# EAGLE board miniBCS-4_J005904M (EAGLE 7.7.0), part 1 of 2
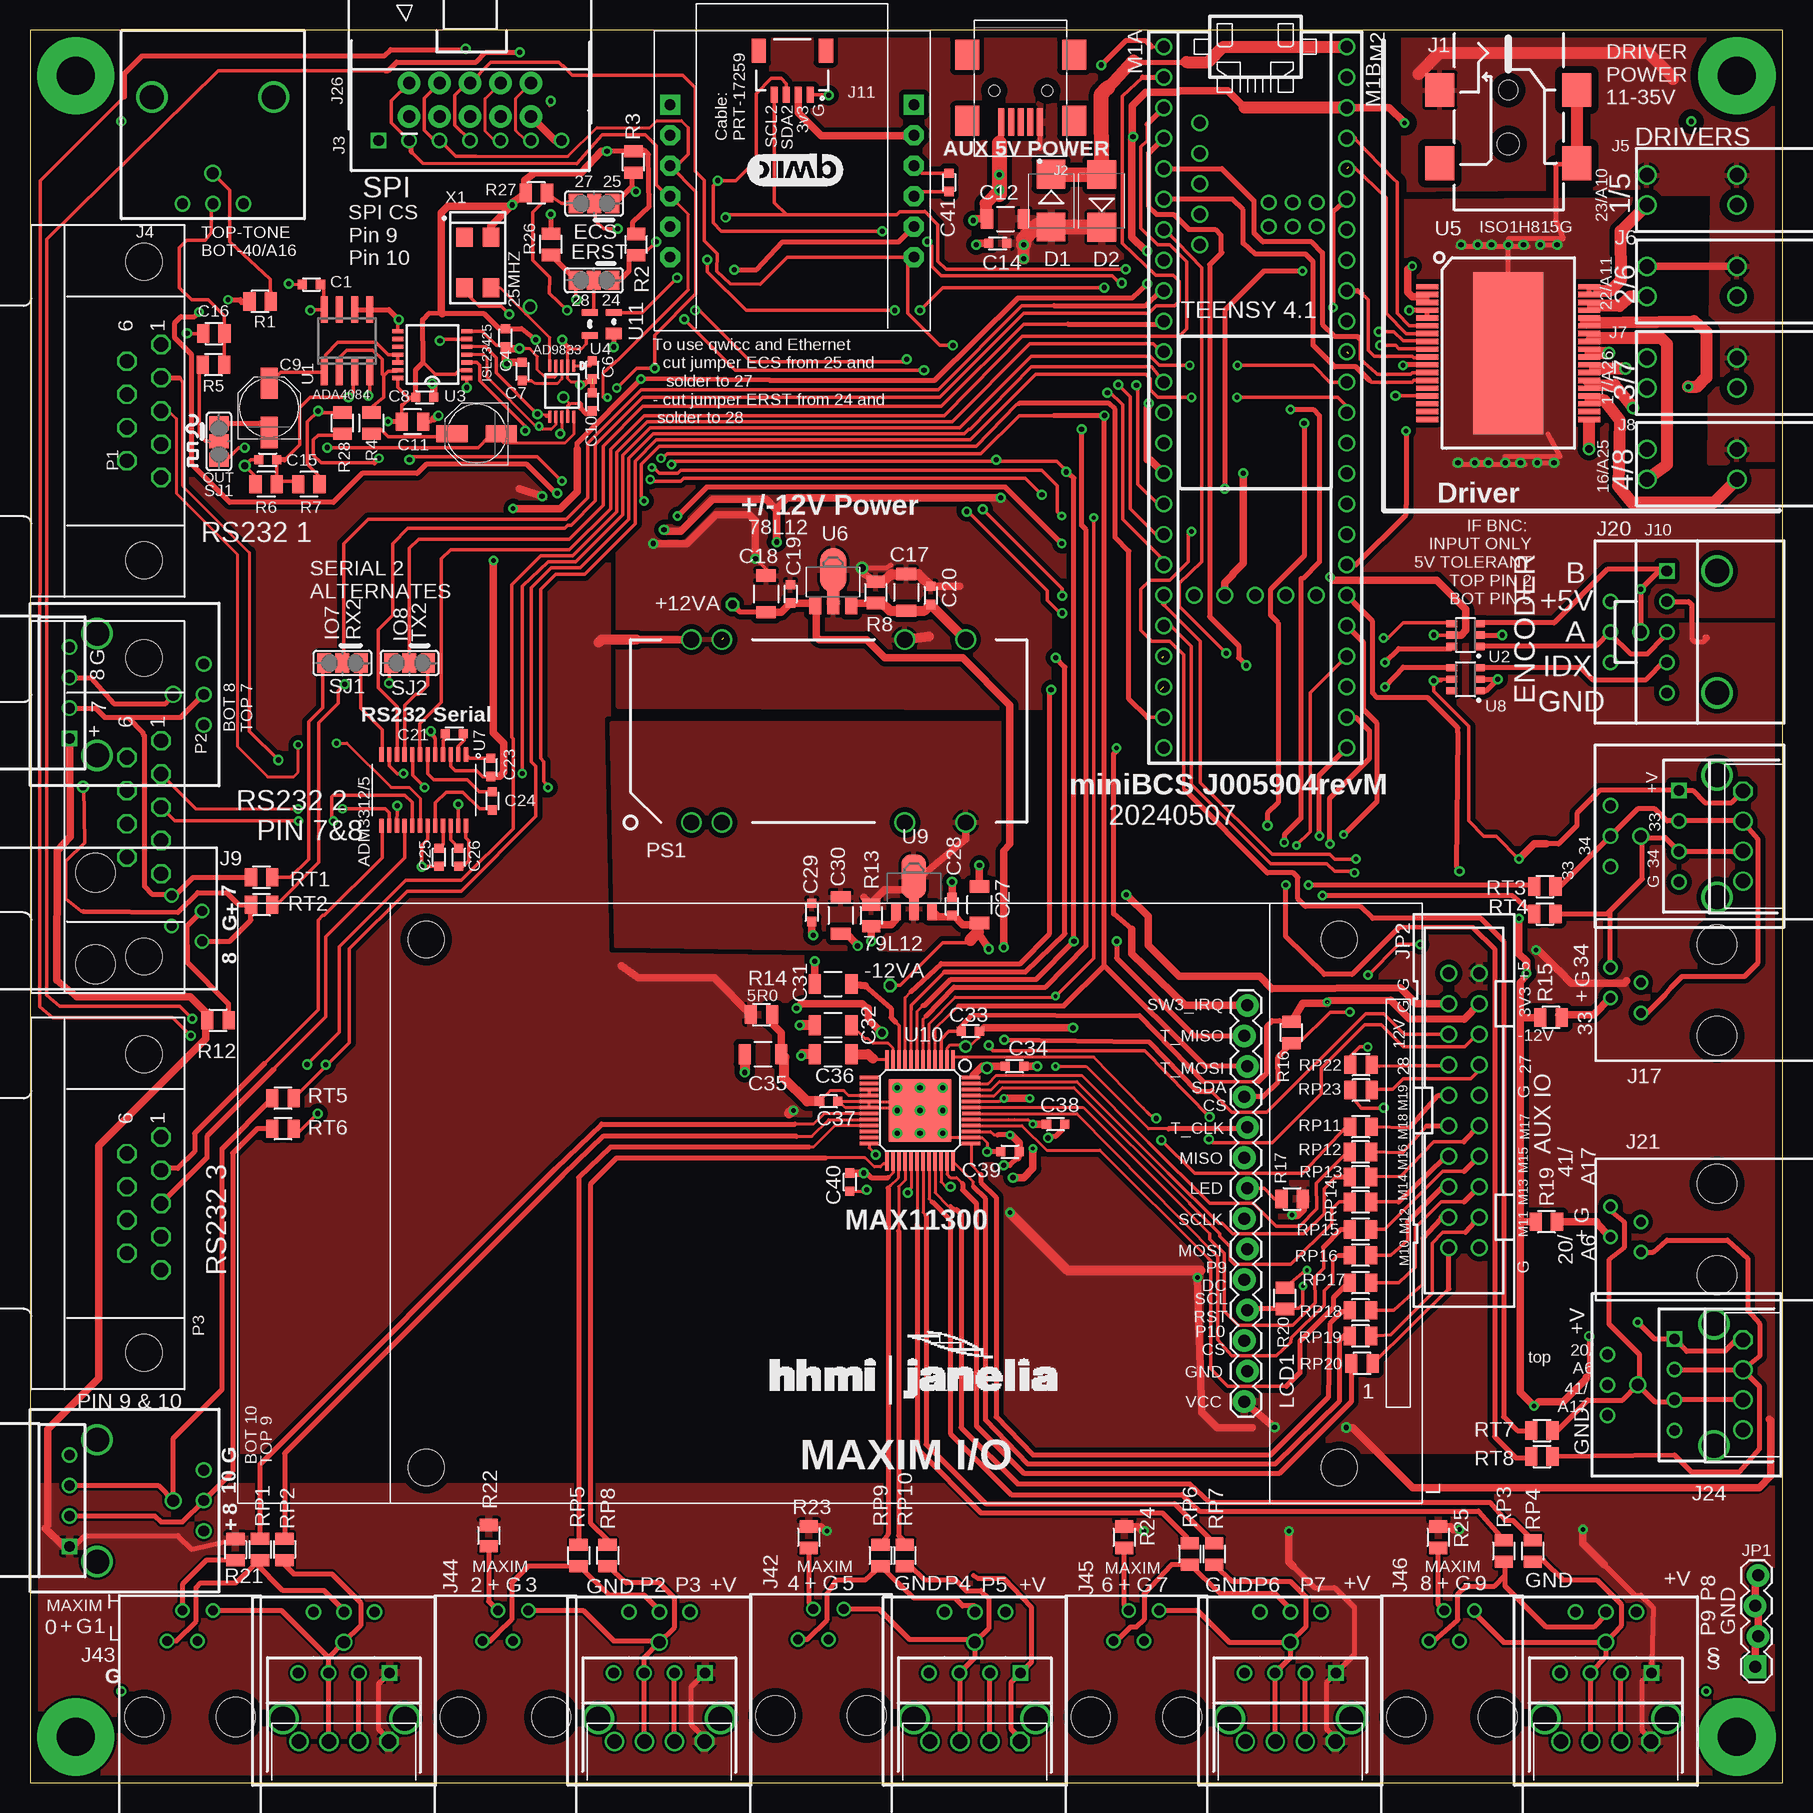
[diagram p0: board, top side]
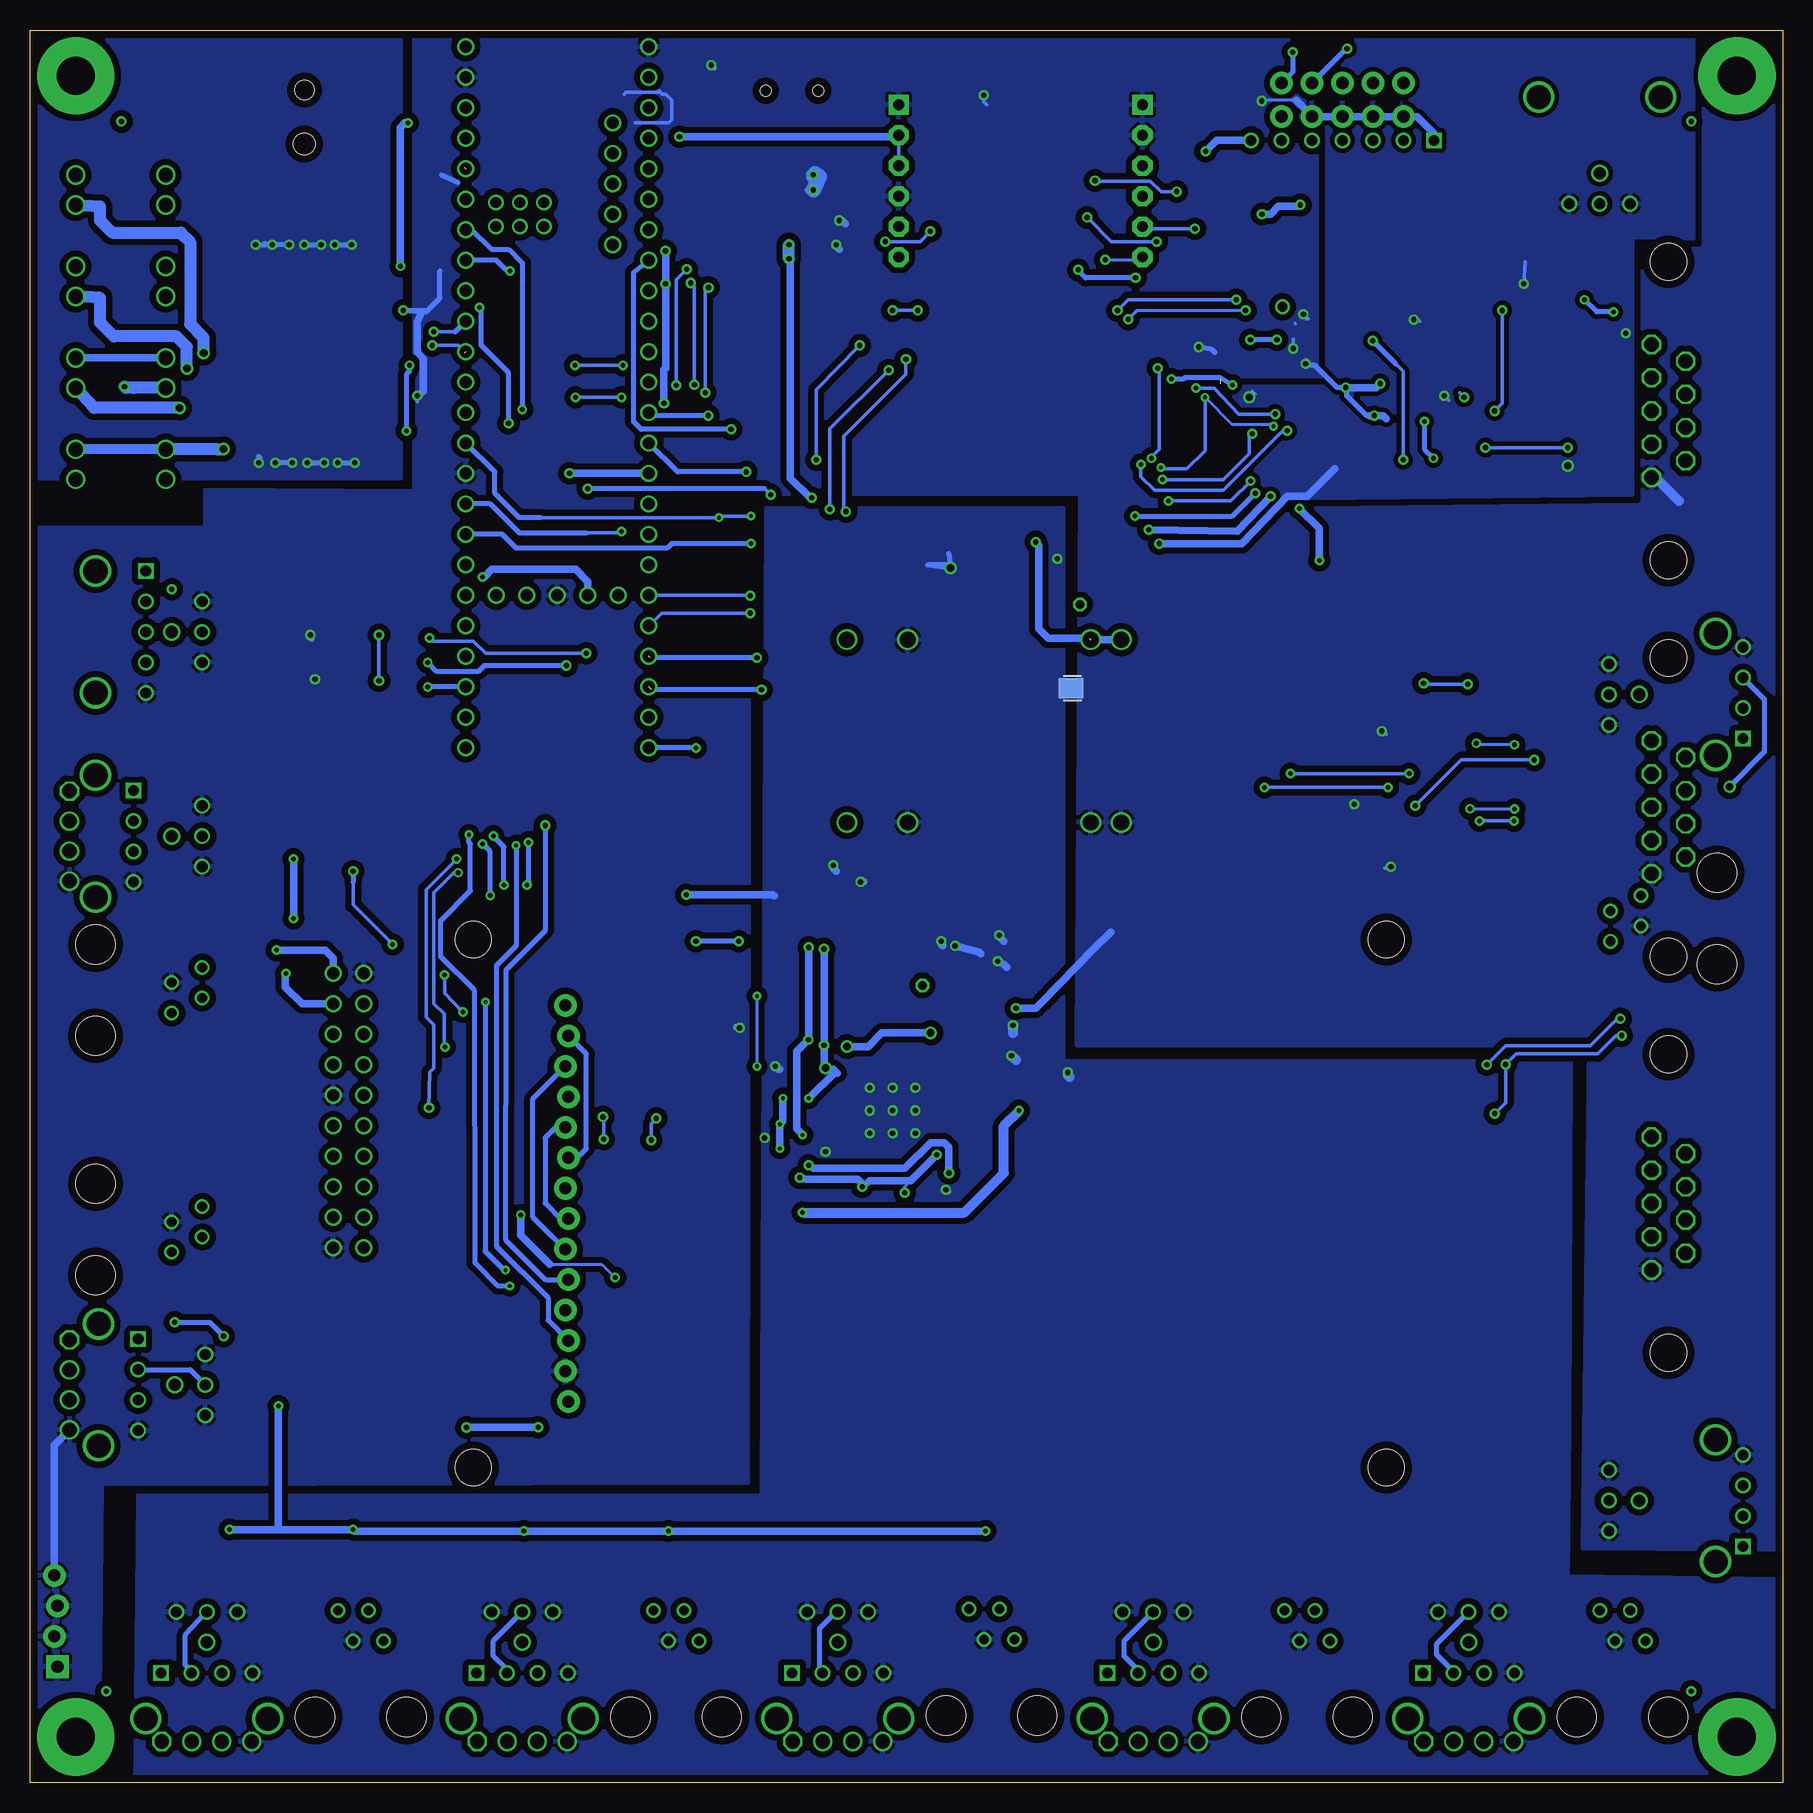
[diagram p1: board, bottom side, seen from below]

Size 146.05 x 146.05 mm. Coordinates in mm from the lower left corner, seen from the top.
Outline: 0,0 146.05,0 146.05,146.05 0,146.05 0,0
Copper layers (1*16): Top 0.035mm / dielectric 1.5mm / Bottom 0.035mm
Design rules "default *": minimum track width 8mil, minimum drill 12mil, track to track 8mil, track to pad 7mil, pad to pad 7mil, via to via 8mil, smd to smd 7mil, copper to edge 25mil, drill to drill 8mil, minimum pad ring 8mil, minimum via ring 8mil, stop-mask expansion 4mil, vias tented up to drill 25mil, thermal gap 10mil
Net classes: 1 power: width 0.254 mm

## Footprints (pad centres in the part's own frame; a part is rotated, then mirrored left to right if it is on the bottom)
PAD032 = drill 0.813: P$1 0,0
0603S = smd 0.762 x 0.762: 1 -0.762,0; 2 0.762,0
PANASONIC_C = smd 2.6 x 1.4: + 2.05,0; - -2.05,0
0805S = smd 1.016 x 1.524: 1 -0.889,0; 2 0.889,0
1206S = smd 1.016 x 1.651: 1 -1.524,0; 2 1.524,0
SMB = smd 2.4 x 2.4: A 2.2,0; C -2.2,0
SJ_2 = smd 1.168 x 1.6: 1 -1.524,0; 2 0,0; 3 1.524,0
FIDUCIAL_VIA = drill 0.432: P$1 0,0
WIZ820IO = drill 0.9 pad 1.676 square: J1.1 -10.16,6.35; J2.1 10.16,6.35 | drill 0.9 pad 1.676 octagon: J1.2 -10.16,3.81; J1.3 -10.16,1.27; J1.4 -10.16,-1.27; J1.5 -10.16,-3.81; J1.6 -10.16,-6.35; J2.2 10.16,3.81; J2.3 10.16,1.27; J2.4 10.16,-1.27; J2.5 10.16,-3.81; J2.6 10.16,-6.35
PJ-002 = smd 2.8 x 2.4: 1A 5,5.7; 1B 11.1,5.7; 2 5,-5.7; 3 11.1,-5.7 | hole 1.6: 5,0 | hole 1.8: 9.5,0
CONN_1734035-2 = smd 0.5 x 2.3: 1 -1.6,2.6; 2 -0.8,2.6; 3 0,2.6; 4 0.8,2.6; 5 1.6,2.6 | smd 2 x 2.5: S1 -4.45,2.5; S2 4.45,2.5; S3 -4.45,-3; S4 4.45,-3 | hole 0.9: -2.2,0; 2.2,0
AMPMODU7-RATH = drill 0.889 square: 1 -7.62,0 | drill 0.889: 2 -5.08,0; 3 -2.54,0; 4 0,0; 5 2.54,0; 6 5.08,0; 7 7.62,0
DUAL-BNC = drill 1.016: P$1 0,0 | drill 0.889: P$2 2.54,0; P$3 2.54,2.54; P$4 2.54,-2.54 | drill 2.007: P$5 -6.35,5.08; P$6 -6.35,-5.08
1894804 = drill 1.2: 1 -1.25,0; 2 1.25,0; 3 -1.25,7.5; 4 1.25,7.5
0432024101 = drill 0.8: 1 -1.9,14.35; 2 -0.64,16.89; 3 0.63,14.35; 4 1.9,16.89 | hole 3.25: -3.81,8; 3.81,8
AMPMODU-5 = drill 0.889 square: 1 -5.08,0 | drill 0.889: 2 -2.54,0; 3 0,0; 4 2.54,0; 5 5.08,0
JST04_1MM_RA = smd 0.6 x 1.35: 1 -1.5,0; 2 -0.5,0; 3 0.5,0; 4 1.5,0 | smd 1.2 x 2: NC1 2.8,-3.675; NC2 -2.8,-3.675
AMPMODU-4-RA = drill 0.889 square: 1 -3.81,0 | drill 0.889: 2 -1.27,0; 3 1.27,0; 4 3.81,0
PHOENIX_1881464 = drill 1.2 octagon: 1 3.75,0 | drill 1.2: 2 1.25,0; 3 -1.25,0; 4 -3.75,0
2X5SHROUDED-RATH = drill 1.016 pad 1.88: 1 -1.397,5.08; 2 1.397,5.08; 3 -1.397,2.54; 4 1.397,2.54; 5 -1.397,0; 6 1.397,0; 7 -1.397,-2.54; 8 1.397,-2.54; 9 -1.397,-5.08; 10 1.397,-5.08
JUMPER = smd 1.016 x 1.651: 1 -0.635,0; 2 0.381,0
1X04_LOCK = drill 1.016 pad 1.88 square: 1 0,0.127 | drill 1.016 pad 1.88: 2 2.54,-0.127; 3 5.08,0.127; 4 7.62,-0.127
PAK100/2500-20 = drill 1 pad 1.422: 1 -11.43,-1.27; 2 -11.43,1.27; 3 -8.89,-1.27; 4 -8.89,1.27; 5 -6.35,-1.27; 6 -6.35,1.27; 7 -3.81,-1.27; 8 -3.81,1.27; 9 -1.27,-1.27; 10 -1.27,1.27; 11 1.27,-1.27; 12 1.27,1.27; 13 3.81,-1.27; 14 3.81,1.27; 15 6.35,-1.27; 16 6.35,1.27; 17 8.89,-1.27; 18 8.89,1.27; 19 11.43,-1.27; 20 11.43,1.27
ILI9341TFT_HOLES = hole 3: -36.08,-22; -36.08,22; 40,22; 40,-22
TFT_LCD_NOHOLES = drill 1.016 pad 1.88: 1 -40.863,16.51; 2 -41.117,13.97; 3 -40.863,11.43; 4 -41.117,8.89; 5 -40.863,6.35; 6 -41.117,3.81; 7 -40.863,1.27; 8 -41.117,-1.27; 9 -40.863,-3.81; 10 -41.117,-6.35; 11 -40.863,-8.89; 12 -41.117,-11.43; 13 -40.863,-13.97; 14 -41.117,-16.51
TEENSY4.1 = drill 1: 0/RX -26.67,-7.62; 1/TX -24.13,-7.62; 2 -21.59,-7.62; 3 -19.05,-7.62; 3V3 6.35,-7.62; 3V3_LO -24.13,7.62; 4 -16.51,-7.62; 5 -13.97,-7.62; 6 -11.43,-7.62; 7 -8.89,-7.62; 8 -6.35,-7.62; 9 -3.81,-7.62; 10/CS -1.27,-7.62; 11/MOSI 1.27,-7.62; 12/MISO 3.81,-7.62; 13/SCK 3.81,7.62; 14/A0 1.27,7.62; 15/A1 -1.27,7.62; 16/A2 -3.81,7.62; 17/A3 -6.35,7.62; 18/A4/SDA -8.89,7.62; 19/A5/SCL -11.43,7.62; 20/A6 -13.97,7.62; 21/A7 -16.51,7.62; 22/A8 -19.05,7.62; 23/A9 -21.59,7.62; 24 8.89,-7.62; 25 11.43,-7.62; 26 13.97,-7.62; 27 16.51,-7.62; 28 19.05,-7.62; 29 21.59,-7.62; 30 24.13,-7.62; 31/A12 26.67,-7.62; 32 29.21,-7.62; 33 29.21,7.62; 34 26.67,7.62; 35 24.13,7.62; 36 21.59,7.62; 37 19.05,7.62; 38 16.51,7.62; 39 13.97,7.62; 40 11.43,7.62; 41 8.89,7.62; AGND -26.67,7.62; GND -29.21,-7.62; GND1 6.35,7.62; GND2 16.51,0; GND-U1 -15.24,-4.62; GND-U2 -12.7,-4.62; PROG 16.51,2.54; RST 16.51,5.08; UD+ -17.78,-4.62; UD- -20.32,-4.62; UVHST -22.86,-4.62; V33 16.51,-2.54; VBAT 16.51,-5.08; VIN -29.21,7.62 | drill 0.9: ELED -16.24,3.12; ER+ -16.24,5.12; ER- -14.24,5.12; ET+ -14.24,1.12; ET- -16.24,1.12; GND-E -14.24,3.12
182-009-MALE = drill 1.194 pad 1.524 octagon: 1 -5.537,10.923; 2 -2.769,10.923; 3 0,10.923; 4 2.769,10.923; 5 5.537,10.923; 6 -4.153,8.08; 7 -1.384,8.08; 8 1.384,8.08; 9 4.153,8.08 | hole 3.048: -12.446,9.501; 12.446,9.501
NDTD = drill 1.321: 2 -10.16,-7.62; 3 -7.62,-7.62; 9 7.62,-7.62; 11 12.7,-7.62; 14 12.7,7.62; 16 7.62,7.62; 22 -7.62,7.62; 23 -10.16,7.62
SO8 = smd 0.6 x 2.2: 1 -1.905,-2.6; 2 -0.635,-2.6; 3 0.635,-2.6; 4 1.905,-2.6; 5 1.905,2.6; 6 0.635,2.6; 7 -0.635,2.6; 8 -1.905,2.6
SOT23-6 = smd 0.6 x 0.9: 1 -0.95,-1.15; 2 0,-1.15; 3 0.95,-1.15; 4 0.95,1.15; 5 0,1.15; 6 -0.95,1.15
TSSOP14 = smd 0.9 x 0.35: 1 -2.875,1.95; 2 -2.875,1.3; 3 -2.875,0.65; 4 -2.875,0; 5 -2.875,-0.65; 6 -2.875,-1.3; 7 -2.875,-1.95; 8 2.875,-1.95; 9 2.875,-1.3; 10 2.875,-0.65; 11 2.875,0; 12 2.875,0.65; 13 2.875,1.3; 14 2.875,1.95
MSOP10 = smd 0.25 x 1: 1 -1,-2.113; 2 -0.5,-2.113; 3 0,-2.113; 4 0.5,-2.113; 5 1,-2.113; 6 1,2.113; 7 0.5,2.113; 8 0,2.113; 9 -0.5,2.113; 10 -1,2.113
PG-DSO-36 = smd 1.83 x 0.44: 1 -6.74,5.525; 2 -6.74,4.875; 3 -6.74,4.225; 4 -6.74,3.575; 5 -6.74,2.925; 6 -6.74,2.275; 7 -6.74,1.625; 8 -6.74,0.975; 9 -6.74,0.325; 10 -6.74,-0.325; 11 -6.74,-0.975; 12 -6.74,-1.625; 13 -6.74,-2.275; 14 -6.74,-2.925; 15 -6.74,-3.575; 16 -6.74,-4.225; 17 -6.74,-4.875; 18 -6.74,-5.525; 19 6.74,-5.525; 20 6.74,-4.875; 21 6.74,-4.225; 22 6.74,-3.575; 23 6.74,-2.925; 24 6.74,-2.275; 25 6.74,-1.625; 26 6.74,-0.975; 27 6.74,-0.325; 28 6.74,0.325; 29 6.74,0.975; 30 6.74,1.625; 31 6.74,2.275; 32 6.74,2.925; 33 6.74,3.575; 34 6.74,4.225; 35 6.74,4.875; 36 6.74,5.525 | smd 5.8 x 13.5: P$1 0,0
SOT89 = smd 1 x 1.5: 1 -1.499,-1.981; 3 1.499,-1.981 | smd 1 x 2: 2 0,-1.727 | smd 2.2 x 3.7: 2@1 0,0.94
TSSOP-24 = smd 0.356 x 1.194: 1 -3.52,-2.96; 2 -2.88,-2.96; 3 -2.24,-2.96; 4 -1.6,-2.96; 5 -0.96,-2.96; 6 -0.32,-2.96; 7 0.32,-2.96; 8 0.96,-2.96; 9 1.6,-2.96; 10 2.24,-2.96; 11 2.88,-2.96; 12 3.52,-2.96; 13 3.52,2.96; 14 2.88,2.96; 15 2.24,2.96; 16 1.6,2.96; 17 0.96,2.96; 18 0.32,2.96; 19 -0.32,2.96; 20 -0.96,2.96; 21 -1.6,2.96; 22 -2.24,2.96; 23 -2.88,2.96; 24 -3.52,2.96
SOT89' = smd 0.8 x 1.4: 1 -1.499,-1.981; 3 1.499,-1.981 | smd 0.8 x 1.9: 2 0,-1.727 | smd 2.032 x 3.65: 2@1 0,0.94
TQFP48 = smd 0.27 x 1.55: 1 -2.75,-4.25; 2 -2.25,-4.25; 3 -1.75,-4.25; 4 -1.25,-4.25; 5 -0.75,-4.25; 6 -0.25,-4.25; 7 0.25,-4.25; 8 0.75,-4.25; 9 1.25,-4.25; 10 1.75,-4.25; 11 2.25,-4.25; 12 2.75,-4.25; 25 2.75,4.25; 26 2.25,4.25; 27 1.75,4.25; 28 1.25,4.25; 29 0.75,4.25; 30 0.25,4.25; 31 -0.25,4.25; 32 -0.75,4.25; 33 -1.25,4.25; 34 -1.75,4.25; 35 -2.25,4.25; 36 -2.75,4.25 | smd 1.55 x 0.27: 13 4.25,-2.75; 14 4.25,-2.25; 15 4.25,-1.75; 16 4.25,-1.25; 17 4.25,-0.75; 18 4.25,-0.25; 19 4.25,0.25; 20 4.25,0.75; 21 4.25,1.25; 22 4.25,1.75; 23 4.25,2.25; 24 4.25,2.75; 37 -4.25,2.75; 38 -4.25,2.25; 39 -4.25,1.75; 40 -4.25,1.25; 41 -4.25,0.75; 43 -4.25,-0.25; 44 -4.25,-0.75; 45 -4.25,-1.25; 46 -4.25,-1.75; 47 -4.25,-2.25; 48 -4.25,-2.75 | smd 1.5 x 0.3: 42 -4.25,0.25 | smd 5.22 x 5.22: P$1 0,0
SOT-143 = smd 0.94 x 1.31: 1 -0.79,-1 | smd 0.55 x 1.31: 2 0.96,-1; 3 0.96,1; 4 -0.96,1
5.2X3.4-4-PAD = smd 1.6 x 1.4: 1 -2.1,-1.1; 2 2.1,-1.1; 3 2.1,1.1; 4 -2.1,1.1

## Placement (x,y rotation side)
25MHZ  [PAD032]  41.68,122.99 90 top
C1  0.1  [0603S]  23.44,124.84 180 top
C4  0.1  [0603S]  39.62,120.4 270 top
C6  0.1  [0603S]  46.86,117.73 270 top
C7  0.1  [0603S]  41.02,117.6 90 top
C8  0.1  [0603S]  32.89,115.44 180 top
C9  [PANASONIC_C]  19.94,114.55 90 top
C10  0.1  [0603S]  46.86,115.06 270 top
C11  1  [0805S]  31.88,113.41 0 top
C12  10  [1206S]  81.28,130.3 180 top
C13  [PANASONIC_C]  37.21,112.39 180 top
C14  0.1  [0603S]  80.64,128.27 180 top
C15  0.1  [0603S]  19.81,110.24 180 top
C16  0.1  [0805S]  15.32,120.75 180 top
C17  10  [1206S]  73.03,99.19 90 top
C18  10  [1206S]  61.34,99.06 90 top
C19  0.1  [0603S]  63.37,99.06 90 top
C20  0.1  [0603S]  75.06,98.93 90 top
C21  0.1  [0603S]  35.36,87.4 0 top
C23  0.1  [0603S]  38.4,84.61 270 top
C24  0.1  [0603S]  38.53,81.81 90 top
C25  0.1  [0603S]  34.09,77.11 270 top
C26  0.1  [0603S]  35.74,77.11 270 top
C27  10  [1206S]  79.12,73.15 270 top
C28  0.1  [0603S]  76.83,73.03 270 top
C29  0.1  [0603S]  65.15,72.52 90 top
C30  10  [1206S]  67.56,72.26 90 top
C31  10  [1206S]  66.93,66.55 180 top
C32  10  [1206S]  66.93,63.12 180 top
C33  0.1  [0603S]  78.36,62.61 0 top
C34  0.1  [0603S]  82.04,59.69 0 top
C35  10uF  [1206S]  61.09,60.71 180 top
C36  10  [1206S]  66.93,60.71 180 top
C37  0.1  [0603S]  66.55,56.77 0 top
C38  0.1  [0603S]  85.47,54.86 0 top
C39  0.1  [0603S]  81.66,52.58 180 top
C40  0.1  [0603S]  68.33,50.04 270 top
C41  .1uF  [0603S]  76.58,133.35 90 top
D1  [SMB]  85.09,131.83 270 top
D2  [SMB]  89.31,131.8 90 top
ECS  [SJ_2]  47.02,131.6 0 top
ERST  [SJ_2]  46.99,125.2 0 top
FID1  FIDUCIAL_VIA  [FIDUCIAL_VIA]  7.62,138.43 0 top
FID2  FIDUCIAL_VIA  [FIDUCIAL_VIA]  138.43,138.43 0 top
FID3  FIDUCIAL_VIA  [FIDUCIAL_VIA]  7.62,7.62 0 top
FID4  FIDUCIAL_VIA  [FIDUCIAL_VIA]  139.7,7.62 0 top
IC1  WIZ850io  [WIZ820IO]  63.5,133.48 0 top
J1  [PJ-002]  123.19,146.05 270 top
J2  1734035-2  [CONN_1734035-2]  82.55,140.97 180 top
J3  [AMPMODU7-RATH]  36.68,136.86 0 top
J4  [DUAL-BNC]  15.24,134.11 270 top
J5  [1894804]  142.24,132.72 90 top
J6  [1894804]  142.24,125.09 90 top
J7  [1894804]  142.24,117.47 90 top
J8  [1894804]  142.24,109.86 90 top
J9  [0432024101]  -2.54,72.01 270 top
J10  [AMPMODU-5]  136.4,95.89 270 top
J11  QWIIC_RIGHT_ANGLE  [JST04_1MM_RA]  63.53,140.67 180 top
J12  [AMPMODU-4-RA]  3.3,90.81 90 top
J13  [DUAL-BNC]  11.94,90.68 0 top
J14  A0/A1  [DUAL-BNC]  134.24,78.87 180 top
J15  [AMPMODU-4-RA]  137.41,78.87 270 top
J16  [PHOENIX_1881464]  142.75,78.87 90 top
J17  [0432024101]  148.59,66.04 90 top
J18  [AMPMODU-4-RA]  3.3,23.5 90 top
J19  [DUAL-BNC]  11.94,23.5 0 top
J20  [DUAL-BNC]  134.24,95.89 180 top
J21  [0432024101]  148.59,46.1 90 top
J22  [DUAL-BNC]  133.99,33.15 180 top
J23  [AMPMODU-4-RA]  137.03,33.15 270 top
J24  [PHOENIX_1881464]  142.75,33.15 90 top
J26  [2X5SHROUDED-RATH]  36.68,140.23 90 top
J27  [DUAL-BNC]  131.32,11.68 90 top
J28  [DUAL-BNC]  26.16,11.68 90 top
J29  [DUAL-BNC]  52.45,11.68 90 top
J30  [DUAL-BNC]  78.74,11.68 90 top
J31  [DUAL-BNC]  105.03,11.68 90 top
J32  [AMPMODU-4-RA]  131.32,9.14 180 top
J33  [AMPMODU-4-RA]  26.16,9.14 180 top
J34  [AMPMODU-4-RA]  52.45,9.14 180 top
J35  [AMPMODU-4-RA]  78.74,9.14 180 top
J36  [AMPMODU-4-RA]  105.03,9.14 180 top
J37  [PHOENIX_1881464]  131.32,3.43 0 top
J38  [PHOENIX_1881464]  26.16,3.43 0 top
J39  [PHOENIX_1881464]  52.45,3.43 0 top
J40  [PHOENIX_1881464]  78.74,3.43 0 top
J41  [PHOENIX_1881464]  105.03,3.43 0 top
J42  [0432024101]  65.91,-2.41 0 top
J43  [0432024101]  13.34,-2.54 0 top
J44  [0432024101]  39.62,-2.54 0 top
J45  [0432024101]  92.2,-2.54 0 top
J46  [0432024101]  118.49,-2.54 0 top
JMP100  JUMPER  [JUMPER]  59.18,91.19 0 bottom
JP1  [1X04_LOCK]  143.89,9.65 90 top
JP2  2520-  [PAK100/2500-20]  119.51,56.01 270 top
L  ILI9341TFT_FP  [ILI9341TFT_HOLES]  73.03,48.26 180 top
LCD1  TFT_LCDTFT_NOHOLES  [TFT_LCD_NOHOLES]  60.33,48.26 180 top
LOGO1  QWIIC_LOGO_8MM  [QWIIC_8MM]  63.75,134.39 180 top
M2  TEENSY4.1  [TEENSY4.1]  102.11,115.44 270 top
OUT  SJ1  [SJ_2]  15.75,111.76 90 top
P1  [182-009-MALE]  0,114.3 270 top
P2  [182-009-MALE]  0,81.28 270 top
P3  [182-009-MALE]  0,48.26 270 top
PS1  [NDTD]  65.28,87.63 0 top
R1  100  [0805S]  19.18,123.42 0 top
R2  4K99  [0805S]  50.52,128.17 270 top
R3  4K99  [0805S]  50.29,135.05 270 top
R4  1250  [0805S]  28.45,113.28 90 top
R5  100  [0805S]  15.29,118.16 0 top
R6  4K99  [0805S]  19.68,108.2 0 top
R7  4K99  [0805S]  23.24,108.2 0 top
R8  2K70  [0805S]  70.48,99.19 90 top
R12  118  [0805S]  15.67,63.53 180 top
R13  2K70  [0805S]  70.1,72.26 90 top
R14  4R99  [0805S]  60.96,64.01 180 top
R15  118  [0805S]  126.75,63.75 0 top
R16  10K0  [0805S]  105.13,62.51 270 top
R17  100  [0805S]  105.18,48.64 180 top
R19  118  [0805S]  126.36,46.74 0 top
R20  10K0  [0805S]  104.57,40.36 270 top
R21  100  [0805S]  17.12,19.41 90 top
R22  100  [0805S]  38.23,20.57 90 top
R23  100  [0805S]  64.9,20.45 90 top
R24  100  [0805S]  91.19,20.45 90 top
R25  100  [0805S]  117.35,20.45 90 top
R26  4K99  [0805S]  43.41,128.19 270 top
R27  4K99  [0805S]  42.19,132.46 0 top
R28  4R99  [0805S]  26.04,113.28 270 top
RP1  100  [0805S]  19.18,19.43 90 top
RP2  100  [0805S]  21.21,19.43 90 top
RP3  100  [0805S]  122.81,19.3 90 top
RP4  100  [0805S]  125.22,19.3 90 top
RP5  100  [0805S]  45.72,18.92 90 top
RP6  100  [0805S]  96.65,19.05 90 top
RP7  100  [0805S]  98.68,19.05 90 top
RP8  100  [0805S]  48.13,18.92 90 top
RP9  100  [0805S]  70.87,18.92 90 top
RP10  100  [0805S]  72.9,18.92 90 top
RP11  100  [0805S]  110.9,54.66 0 top
RP12  100  [0805S]  110.87,52.55 0 top
RP13  100  [0805S]  110.87,50.47 0 top
RP14  100  [0805S]  110.87,48.39 0 top
RP15  100  [0805S]  110.87,46.1 0 top
RP16  100  [0805S]  110.87,43.94 0 top
RP17  100  [0805S]  110.87,41.66 0 top
RP18  100  [0805S]  110.87,39.37 0 top
RP19  100  [0805S]  110.87,37.21 0 top
RP20  100  [0805S]  111,34.92 0 top
RP22  100  [0805S]  110.92,59.82 0 top
RP23  100  [0805S]  110.92,57.71 0 top
RT1  100  [0805S]  19.3,75.44 0 top
RT2  100  [0805S]  19.3,73.15 0 top
RT3  100  [0805S]  126.24,74.68 180 top
RT4  100  [0805S]  126.24,72.39 180 top
RT5  100  [0805S]  21.08,57.02 0 top
RT6  100  [0805S]  21.08,54.48 0 top
RT7  100  [0805S]  125.98,29.34 180 top
RT8  100  [0805S]  125.98,27.18 180 top
SJ1  [SJ_2]  26.04,93.29 180 top
SJ2  [SJ_2]  31.62,93.29 180 top
U1  ADA4084  [SO8]  26.42,120.14 0 top
U2  2G17  [SOT23-6]  119.63,95.63 90 top
U3  ISL23425  [TSSOP14]  33.53,119 180 top
U4  AD9833  [MSOP10]  44.32,115.95 180 top
U5  ISO1H815G  [PG-DSO-36]  123.19,119.13 0 top
U6  78L12  [SOT89]  66.93,100.08 0 top
U7  ADM3312/5  [TSSOP-24]  32.82,82.7 180 top
U8  2G17  [SOT23-6]  119.63,91.95 90 top
U9  79L12  [SOT89']  73.66,74.55 0 top
U10  MAX11300GCM  [TQFP48]  74.17,56.01 180 top
U11  CAT811  [SOT-143]  47.65,121.54 90 top
U$1  JFRC-LOGOLOGO_2014_DOC  [LOGO_JANELIA_2014_DOC]  28.7,94.56 0 top
X1  OSC-OE-CFPS-9  [5.2X3.4-4-PAD]  37.31,126.67 270 top

## Library data of the parts
25MHZ C1 C4 C6-C8 C10 C11 C15 C21 C23-C26 FID1-FID4 J1 J3-J10 J12-J24 J26-J46 JMP100 L LCD1 PS1 R4 R6 R7 U2-U5 U7 U8 U11 U$1 = STEVES_BU
C9 C13 = rcl
C12 C14 C16-C20 C27-C41 R1-R3 R5 R8 R12-R17 R19-R28 RP1-RP20 RP22 RP23 RT1-RT8 = SteveS
D1 D2 = diode
ECS ERST OUT SJ1 SJ2 = jumper
IC1 = Wiz820io
J2 = 1734035-2; MANUFACTURER: TE Connectivity; PARTREV: F; STANDARD: Manufacturer recommendations
J11 = SparkFun-Connectors; PROD_ID: CONN-13694
JP1 = SparkFun
JP2 = con-3m; OC_FARNELL: unknown; OC_NEWARK: unknown
LOGO1 = SparkFun-Aesthetics
M2 = teensy4.1.dist
P1-P3 = con-subd; OC_FARNELL: unknown; OC_NEWARK: unknown
U1 = analog-devices; MF: ALTERA CORPORATION; MPN: AD712KRZ; OC_FARNELL: 1263975; OC_NEWARK: 59K4556
U6 = linear
U9 = jfrc
U10 = MAX11300
X1 = IQD-Frequency-Products

## Nets
!CS_DDS: M2.19/A5/SCL U4.8
!CS_POT: M2.31/A12 U3.6
!CS_TCH: LCD1.11 M2.38 R16.2
!MAX_CS: M2.6 U10.6
!MAXCNVT: M2.30 U10.9
!MAXINT: M2.29 U10.8
!TCHINT: LCD1.14 M2.32
!TFT_CS: LCD1.3 M2.36
!TFTRST: LCD1.4 M2.37 R20.2
+1V65A: C15.1 R6.2 R7.1 U1.3
+3V3ADDS: C1.1 R7.2 R28.1 U1.8
+3V3D: C4.1 C6.2 C8.2 C10.1 C11.1 C23.2 C33.1 C41.2 IC1.J2.2 IC1.J2.3 J3.7 J11.2 J12.1 J15.1 J16.1 J18.1 J23.1 J24.1 J26.9 J32.1 J33.1 J34.1 J36.1 J37.1 J38.1 J39.1 J41.1 JP2.4 M2.3V3 M2.3V3_LO M2.V33 R2.1 R3.1 R12.2 R15.1 R16.1 R19.1 R20.1 R21.2 R22.2 R23.2 R24.2 R25.2 R26.1 R27.1 R28.2 U2.5 U3.2 U3.14 U4.2 U5.2 U5.3 U7.3 U8.5 U10.3 U11.4 X1.4
+5VA: C35.1 C37.1 R14.1 U10.15 U10.16
+5VD: C12.1 C14.1 D1.A D2.C J2.1 J10.2 JP2.2 LCD1.1 PS1.22 PS1.23 R14.2 R17.1
+12VA: C18.1 C19.1 C39.1 C40.1 JP2.5 U6.1 U10.26 U10.39
+15V: C17.1 C20.1 PS1.14 R8.1 U6.3
-12VA: C27.2 C28.2 C34.1 C38.1 JP2.6 U9.3 U10.24 U10.29 U10.34 U10.41 U10.44 U10.48
-15V: C29.2 C30.2 PS1.11 R13.2 U9.2 U9.2@1
A6/20: M2.20/A6 RT8.2
A16: M2.40 R1.1
A17: M2.41 RT7.2
AGND: C1.2 C10.2 C15.2 C16.2 C17.2 C18.2 C19.2 C20.2 C27.1 C28.1 C29.1 C30.1 C31.2 C32.2 C34.2 C35.2 C36.2 C37.2 C38.2 C39.2 C40.2 J4.P$3 J4.P$4 J27.P$3 J27.P$4 J28.P$3 J28.P$4 J29.P$3 J29.P$4 J30.P$3 J30.P$4 J31.P$3 J31.P$4 J32.4 J33.4 J34.4 J35.4 J36.4 J37.4 J38.4 J39.4 J40.4 J41.4 J42.3 J43.3 J44.3 J45.3 J46.3 JMP100.1 JP2.3 PS1.9 PS1.16 R6.1 R8.2 R13.1 U1.4 U1.5 U1.6 U3.8 U4.9 U6.2 U6.2@1 U9.1 U10.17 U10.18 U10.38 U10.P$1
CIPO: IC1.J2.6 J3.4 J26.6 LCD1.9 LCD1.13 M2.12/MISO U3.3 U10.7
COPI: IC1.J1.3 J3.3 J26.4 LCD1.6 LCD1.12 M2.11/MOSI U3.5 U4.6 U10.4
DAC0_OUT: J4.P$1 R1.2
DAC_REF: C36.1 U10.12
DDS: C13.- OUT.1 U4.10
DDS_OUT: C16.1 J4.P$2 R5.2
DGND: C4.2 C7.2 C8.1 C11.2 C12.2 C14.2 C25.2 C33.2 C41.1 IC1.J1.1 IC1.J1.2 IC1.J2.1 IC1.J2.4 J2.5 J3.1 J9.3 J10.5 J11.1 J12.4 J13.P$3 J13.P$4 J14.P$3 J14.P$4 J15.4 J16.4 J17.3 J18.4 J19.P$3 J19.P$4 J20.P$3 J20.P$4 J21.3 J22.P$3 J22.P$4 J23.4 J24.4 J26.1 J26.3 J26.5 J26.7 JMP100.2 JP1.1 JP1.2 JP1.3 JP1.4 JP2.1 JP2.10 JP2.20 LCD1.2 M2.AGND M2.GND M2.GND1 M2.GND2 P1.5 P2.5 P3.5 PS1.2 PS1.3 U2.2 U3.1 U3.7 U4.4 U5.4 U5.5 U5.15 U7.5 U7.19 U7.23 U8.1 U8.2 U10.2 U11.1 X1.2
EA: J28.P$2 J33.2 J38.2 J43.1 RP1.1
EA1: J29.P$2 J34.2 J39.2 J44.1 RP5.1
EA2: J30.P$2 J35.2 J40.2 J42.1 RP9.1
EA3: J31.P$2 J36.2 J41.2 J45.1 RP6.1
EA4: J27.P$2 J32.2 J37.2 J46.1 RP3.1
EA5: J14.P$2 J15.2 J16.2 J17.1 RT3.1
EA6: J21.1 J22.P$2 J23.2 J24.2 RT8.1
EA7: J9.1 J12.2 J13.P$2 RT1.1
EA9: J18.2 J19.P$2 RT6.1
EA10: J18.3 J19.P$1 RT5.1
EB: J28.P$1 J33.3 J38.3 J43.4 RP2.1
EB1: J29.P$1 J34.3 J39.3 J44.4 RP8.1
EB2: J30.P$1 J35.3 J40.3 J42.4 RP10.1
EB3: J31.P$1 J36.3 J41.3 J45.4 RP7.1
EB4: J27.P$1 J32.3 J37.3 J46.4 RP4.1
EB5: J14.P$1 J15.3 J16.3 J17.4 RT4.1
EB6: J21.4 J22.P$1 J23.3 J24.3 RT7.1
EB8: J9.4 J12.3 J13.P$1 RT2.1
EN_A: J10.3 J20.P$2 U2.1
EN_B: J10.1 J20.P$1 U2.3
ENCA3V3: M2.2 U2.6
ENCB3V3: M2.5 U2.4
ERST: IC1.J2.5 U11.2
ETH_CS/SDA2: ECS.2 ECS.3 IC1.J1.5 J11.3 M2.25 R3.2
ETH_INT: IC1.J1.6 M2.26
ETH_RST/SCL2: ERST.2 ERST.3 J11.4 M2.24 R2.2 U11.3
EXT_REF: C32.1 U10.11
GNDBB: J1.2 J5.2 J5.4 J6.2 J6.4 J7.2 J7.4 J8.2 J8.4 U5.19
IDX: J10.4 U8.3
IDX3V3: M2.35 U8.4
INT_REF: C31.1 U10.10
N$1: JP2.8 RP23.2
N$2: J7.1 U5.23 U5.24
N$3: J9.2 R12.1
N$4: J21.2 R19.2
N$8: J17.2 R15.2
N$9: P2.2 U7.14
N$10: J5.1 U5.27 U5.28
N$11: P2.3 U7.17
N$12: C23.1 U7.1
N$13: 25MHZ.P$1 U4.5 X1.3
N$14: J6.1 U5.25 U5.26
N$15: C25.1 U7.21
N$16: P1.3 U7.18
N$17: J8.3 U5.29 U5.30
N$18: J8.1 U5.21 U5.22
N$20: C7.1 U4.3
N$21: C26.2 U7.24
N$22: C6.1 U4.1
N$23: C26.1 U7.22
N$24: J43.2 R21.1
N$25: C21.1 U7.4
N$26: C21.2 U7.2
N$27: C24.1 U7.20
N$28: P1.2 U7.15
N$29: J42.2 R23.1
N$30: J5.3 U5.35 U5.36
N$31: C24.2 U7.6
N$32: J6.3 U5.33 U5.34
N$33: J46.2 R25.1
N$34: C13.+ R4.1
N$35: J45.2 R24.1
N$36: R4.2 U1.2 U3.13
N$37: U1.7
N$38: C9.+ U1.1 U3.11 U3.12
N$40: J7.3 U5.31 U5.32
N$41: J44.2 R22.1
N$42: JP2.14 RP15.2
N$44: P3.3 U7.16
N$51: JP2.13 RP14.2
N$53: JP2.19 RP20.2
N$54: JP2.18 RP19.2
N$55: JP2.17 RP18.2
N$56: JP2.16 RP17.2
N$57: JP2.15 RP16.2
N$58: JP2.12 RP13.2
N$59: JP2.11 RP12.2
N$60: JP2.9 RP11.2
N$62: JP2.7 RP22.2
P0: RP1.2 U10.19
P1: RP2.2 U10.20
P2: RP5.2 U10.21
P3: RP8.2 U10.25
P4: RP9.2 U10.27
P5: RP10.2 U10.28
P6: RP6.2 U10.30
P7: RP7.2 U10.31
P8: RP3.2 U10.32
P9: RP4.2 U10.33
P10: RP20.1 U10.35
P11: RP19.1 U10.36
P12: RP18.1 U10.37
P13: RP17.1 U10.40
P14: RP16.1 U10.42
P15: RP15.1 U10.43
P16: RP14.1 U10.45
P17: RP13.1 U10.46
P18: RP12.1 U10.47
P19: RP11.1 U10.1
PIN7: RT1.2 SJ1.3
PIN8: RT2.2 SJ2.3
PIN9: J3.5 J26.8 M2.9 RT6.2
PIN10: J3.6 J26.10 M2.10/CS RT5.2
PIN27/ALT_ECS: ECS.1 M2.27 R27.2 RP23.1
PIN28/ALT_ERST: ERST.1 M2.28 R26.2 RP22.1
PIN33: M2.33 RT3.2
PIN34: M2.34 RT4.2
PWR_P4-5: J35.1 J40.1
RX1: M2.0/RX U7.10
RX2: M2.7 SJ1.1 SJ1.2 U7.12
RX3: M2.15/A1 U7.11
RX3_232: P3.2 U7.13
SCLK: IC1.J1.4 J3.2 J26.2 LCD1.7 LCD1.10 M2.13/SCK U3.4 U4.7 U10.5
SJ1: C9.- OUT.2 OUT.3 R5.1
SOL1: M2.23/A9 U5.6
SOL2: M2.22/A8 U5.7
SOL3: M2.17/A3 U5.8
SOL4: M2.16/A2 U5.9
SOL5: M2.18/A4/SDA U5.10
SOL6: M2.39 U5.11
SOL7: M2.3 U5.12
SOL8: M2.4 U5.13
TFT_DC: LCD1.5 M2.21/A7
TFT_LED: LCD1.8 R17.2
TX1: M2.1/TX U7.7
TX2: M2.8 SJ2.1 SJ2.2 U7.9
TX3: M2.14/A0 U7.8
VBB: J1.1A J1.1B U5.P$1
VIN: D1.C D2.A M2.VIN

## Tracks (layer width: path | path; a pad name or v marks a point on that pad's centre or on a via)
!CS_DDS  (via drill 0.38, 0.38 pad 0.61, 0.43)
  Top 0.254: U4.8 44.32,112.65 v44.2,112.39
  Top 0.305: v84.33,107.31 82.93,108.71 54.48,108.71 54.23,108.46 51.82,108.46 v51.69,108.58
  Top 0.406: v106.05,125.98 102.87,125.98 99.57,122.68 v99.57,107.82
  Bottom 0.305: 84.84,107.82 v84.33,107.31 | v51.69,108.58 46.61,108.58 44.45,110.74 44.45,112.14 v44.2,112.39
  Bottom 0.406: 84.84,107.82 v99.57,107.82 | v106.05,125.98 106.43,126.11 107.19,126.87 M2.19/A5/SCL
!CS_POT  (via drill 0.38, 0.43)
  Top 0.305: v34.16,120.14 34.42,120.14 34.54,120.27 35.99,120.27 U3.6 | 82.42,114.94 82.17,114.81 78.87,111.38 52.45,111.38 50.93,109.86 50.93,107.19 v51.18,106.81 | v44.32,108.46 42.29,110.49 31.88,110.49 v31.62,110.24 | 93.09,88.77 M2.31/A12
  Top 0.406: 93.09,88.77 91.57,90.3 91.57,102.62 90.42,103.76 90.42,114.43 89.92,114.94 82.42,114.94
  Bottom 0.305: v51.18,106.81 45.97,106.81 v44.32,108.46 | v31.62,110.24 31.62,117.6 32.26,118.24
  Bottom 0.406: 32.26,118.24 v34.16,120.14
!CS_TCH  (via drill 0.38, 0.43)
  Top 0.305: 104.65,61.21 R16.2 105.74,61.59 108.36,64.21 v109.98,64.21 | v115.82,69.85 114.07,69.88 v111.51,67.28
  Top 0.406: v119.13,75.95 118.87,76.33 119,87.5 119,87.88 116.46,90.42 112.27,90.42 111.89,90.81 111.89,96.77 M2.38 111,97.66 | 104.52,61.47 R16.2 103.99,60.43 104.01,58.42 102.74,57.15 LCD1.11
  Bottom 0.305: 119.13,75.06 119.13,73.15 v115.82,69.85 | v111.51,67.28 111.51,65.79 v109.98,64.21
  Bottom 0.406: v119.13,75.95 119.13,75.06
!MAX_CS  (via drill 0.43)
  Top 0.254: 74.68,63.88 74.42,63.62 U10.6
  Top 0.406: 74.68,63.88 77.01,66.29 84.63,66.29 88.01,69.72 88.01,104.39 87.63,104.78 v87.63,112.78
  Bottom 0.406: v87.63,112.78 95.12,112.78 95.76,113.41 95.76,125.86 M2.6
!MAXCNVT  (via drill 0.43)  (1 unrouted)
  Top 0.254: U10.9 72.92,65.42 73.41,65.91
  Top 0.406: 73.41,65.91 75.92,68.25 82.53,68.25 84.96,70.74 84.96,90.93 v85.09,91.06
  Bottom 0.406: v85.09,91.06 94.23,91.06
!MAXINT  (via drill 0.43)  (1 unrouted)
  Top 0.254: U10.8 73.42,64.4
  Top 0.305: 73.42,64.4 73.42,64.78 76.22,67.56
  Top 0.406: 76.22,67.56 82.96,67.56 86.23,70.74 86.23,92.96 v85.47,93.73
  Bottom 0.406: v85.47,93.73 94.36,93.73
!TCHINT  (via drill 0.38)
  Top 0.406: 91.82,71.12 90.3,72.39 90.3,85.72 90.55,85.98 v90.55,86.23
  Top 0.61: 91.82,71.12 91.82,69.06 96.27,64.77 LCD1.14
  Bottom 0.406: v90.55,86.23 M2.32
!TFT_CS  (via drill 0.3)
  Top 0.305: M2.36 106.68,90.81 106.68,79.25 v105.54,78.11
  Bottom 0.406: v105.54,78.11 105.54,69.72 107.19,68.07 107.19,44.7 102.87,40.39 102.87,38.51 LCD1.3
!TFTRST  (via drill 0.3)
  Top 0.305: v106.07,41.38 106.05,41.17 106.05,39.88 105.72,39.55 104.93,39.55 R20.2
  Top 0.406: R20.2 101.57,39.5 LCD1.4 | v109.47,78.99 112.27,81.79 112.27,88.27 111.12,89.41 111.12,95 M2.37
  Bottom 0.406: v106.07,41.38 107.04,41.38 108.97,43.31 108.99,66.02 111.84,68.83 111.84,71.83 109.35,74.32 109.35,78.23 109.47,78.36 v109.47,78.99
+1V65A  (via drill 0.43)
  Top 0.305: R7.1 22.1,108.46 20.83,108.46 R6.2 C15.1 | U1.3 26.92,117.42 26.92,115.82 v26.54,115.44 23.37,115.44 22.48,114.55 22.48,111.51 21.21,110.24
  Top 0.406: 21.21,110.24 C15.1
  Bottom 0.305: 26.92,115.82 v26.54,115.44
+3V3ADDS  (via drill 0.43)
  Top 0.305: C1.1 24.49,124.82 U1.8 23.43,122.74 v23.37,122.68 | R28.1 24.13,114.17 v24,114.3 23.11,113.41 23.11,109.86 24.13,108.84 R7.2
  Bottom 0.305: v23.37,122.68 23.37,114.94 v24,114.3
+3V3D  (via drill 0.3, 0.38, 0.38 pad 0.61, 0.43)  (2 unrouted)
  Top 0.254: C6.2 46.35,116.71 45.09,116.71 44.83,116.97 44.83,118.06 U4.2 44.82,119.37 44.96,119.51 45.97,119.51 46.35,119.89
  Top 0.305: U5.2 116.13,124 115.95,123.83 | C41.2 74.3,134.11 IC1.J2.3 | U7.3 35.06,84.7 35.43,84.33 37.21,84.33 37.72,83.82 38.51,83.82 C23.2 | U3.14 30.65,116.29 31.5,115.44 C8.2 31.75,115.44 30.99,114.68 C11.1 30.99,114.81 | U3.2 35.78,117.7 35.43,117.35 33.78,117.35 32.77,118.36 | R28.2 26.04,112.27 24,112.27 23.62,111.89 23.62,110.62 24.26,109.98 28.7,109.98 | U2.5 v116.97,95.63 | v116.97,91.82 117.6,91.82 117.73,91.95 U8.5 117.09,91.95 v116.97,91.82 | v116.97,91.82 116.97,90.93 119.89,88.01 119.89,80.14 121.16,78.87 122.17,78.87 v124.08,76.96 | U10.3 75.92,61.95 76.58,62.61 C33.1 | 97.79,58.42 102.36,58.42 | v106.43,42.7 106.07,42.47 R20.1 | 46.35,119.89 46.35,120.28 U11.4
  Top 0.406: U5.3 U5.2 | C8.2 32.13,117.73 32.77,118.36 32.72,121.92 33.25,122.43 34.34,122.4 37.85,122.4 39.09,121.16 C4.1 40.97,121.16 v42.14,120.24 | 46.86,116.59 C10.1 46.86,115.7 | J38.1 29.91,3.62 29.08,4.45 29.08,8.26 J33.1 | J39.1 56.2,3.74 55.12,4.83 55.12,8 J34.1 | 105.28,18.03 107.06,16.26 108.71,16.26 110.36,14.61 110.36,10.67 J36.1 108.08,8.38 108.08,4.45 108.78,3.74 J41.1 | 131.19,18.16 133.73,15.62 134.24,15.62 135.25,14.61 135.13,9.91 J32.1 134.37,8.51 134.37,4.32 135.07,3.62 J37.1 | J24.1 142.18,36.9 141.22,35.94 138.05,35.94 J23.1 135.38,36.96 v133.99,38.35 | v129.92,37.21 129.92,34.04 129.67,33.78 | J16.1 141.79,81.66 139.57,81.66 138.56,82.68 J15.1 130.81,82.68 128.91,80.77 128.91,79.76 127.38,78.23 126.36,78.23 | 61.85,116.84 61.66,116.84 | 61.66,116.84 v50.93,116.97 45.59,111.63 45.59,111.12 | v45.85,116.46 46.1,116.46 46.35,116.71 | C11.1 v29.84,113.41 | v29.08,110.36 28.7,109.98 | J18.1 3.68,19.68 4.57,20.57 12.32,20.57 13.46,19.43 R21.2 | C33.1 77.6,62.99 78.54,63.98 92.46,63.91 97.79,58.42 | 102.36,58.42 103.07,59.13 103.07,63.07 103.5,63.5 104.14,63.5 R16.1 | R3.1 v48.08,135.94 | R2.1 50.24,129.34 50.24,130.07 51.59,131.34 51.54,135.69 51.18,136.02 50.37,136.02 R3.1 | 61.66,116.84 75.39,116.84 82.35,123.72 91.85,123.72 v93.09,124.92 | v43.38,130.71 R26.1 | 50.32,135.91 R3.1 | v44.35,120.24 44.22,120.24 44.96,119.51
  Top 0.61: 101.22,139.57 99.82,140.97 95.76,140.97 95.63,140.84 92.96,140.84 91.85,139.75 91.87,137.52 v91.92,137.16 91.82,137.06 91.8,128.78 92.96,127.64 v93.09,127.64 | 115.95,123.83 115.19,123.83 114.81,124.21 114.81,126.11 v115.19,126.36 | v114.55,138.3 113.28,139.57 M2.3V3_LO | v93.22,114.94 93.22,114.68 93.09,114.55 93.09,110.24 93.34,110.24 M2.3V3 | v66.42,20.95 66.29,20.95 65.91,21.34 R23.2 | v92.84,20.95 92.71,20.95 92.33,21.34 R24.2 | v104.9,20.95 104.9,18.41 105.28,18.03 | v119.13,21.08 118.62,21.08 118.36,21.34 116.84,21.34 | v129.41,21.08 129.41,19.94 131.19,18.16 | 129.67,33.78 129.67,33.66 127.76,31.75 125.73,31.75 v125.35,31.37 124.21,32.51 124.21,46.74 | 126.36,78.23 125.35,78.23 v124.08,76.96 | v124.08,72.01 124.08,69.09 124.71,68.45 v124.71,67.44 124.71,67.31 124.21,66.67 124.21,63.75 | 104.52,63.37 R16.1 106.07,64.95 108.1,64.95 108.1,64.97 108.28,65.15 113.41,65.18 114.94,63.65 119.51,63.63 JP2.4 | 124.21,63.75 124.21,46.74 | R15.1 124.21,63.75 | R19.1 124.21,46.74 | J18.1 2.79,19.68 1.27,21.21 1.5,21.44 1.5,29.44 5.74,33.68 5.74,53.06 14.66,61.98 14.66,63.58 R12.2 14.68,63.63 14.68,64.16 13.36,65.48 3.89,65.48 2.23,66.88 2.26,77.67 3.35,78.84 3.35,78.89 J12.1 | C23.2 39.14,83.84 39.5,84.2 39.5,86.61 38.61,87.5 v38.61,101.85 | v40.26,106.17 44.2,106.17 45.59,107.57 45.59,111.12 | v108.33,100.46 108.58,100.2 117.22,100.2 119.63,97.79 119.63,96.01 119.25,95.63 U2.5 | v101.09,109.12 101.09,101.6 100.24,100.75 100.24,100.65 99.57,99.97 M2.V33 | J11.2 64.03,139.15 65.94,137.24 73.61,137.24 IC1.J2.2 | v48.08,135.94 47.6,135.94 45.95,134.16 42.06,134.14 41.25,133.53 41.25,132.84 R27.1 40.18,131.67 v40.18,131.47 40.08,131.37
  Top 0.61: J3.7 43.74,136.85 J26.9 | X1.4 38.41,129.7 40.08,131.37 | 40.08,131.37 34.82,131.37 34.27,130.81 34.27,122.48 34.34,122.4
  Top 1.016: M2.3V3_LO 101.22,139.57
  Bottom 0.305: IC1.J2.2 IC1.J2.3 | v116.97,95.63 v116.97,91.82
  Bottom 0.406: v108.1,65.05 108.13,44.27 106.55,42.72 106.53,42.62 v106.43,42.7 | v133.99,38.35 131.06,38.35 v129.92,37.21 | v50.93,116.97 49.91,116.97 49.78,117.09 46.86,117.09 v45.85,116.46 | v29.84,113.41 29.84,111.12 v29.08,110.36 | v93.09,124.92 93.04,124.99 | v42.14,120.24 v44.35,120.24
  Bottom 0.61: v93.09,127.64 v93.09,124.92 93.09,117.86 93.22,117.73 v93.22,114.94 | v114.55,138.3 114.81,138.3 115.19,137.92 v115.19,126.36 | v91.92,137.16 73.79,137.16 IC1.J2.2 | v66.42,20.95 v92.84,20.95 v104.9,20.95 119,20.95 v119.13,21.08 125.35,21.08 | 125.35,21.08 v129.41,21.08 | v125.35,31.37 125.35,21.08 | v124.08,76.96 v124.08,72.01 | v38.61,101.85 38.61,104.52 v40.26,106.17 | v108.33,100.46 108.2,100.46 107.57,101.09 100.58,101.09 99.57,100.08 M2.V33 | JP2.4 123.37,64.9 124.77,66.29 124.77,67.39 v124.71,67.44 | M2.3V3 101.07,109.09 v101.09,109.12 | v43.38,130.71 42.67,130.71 42.04,131.34 40.31,131.34 v40.18,131.47 | v48.08,135.94 47.17,136.85 J3.7
  pour Top: -1.52,24.64 -1.52,-1.4 150.75,-1.4 150.75,24.64
+5VA
  Top 0.254: U10.15 U10.16 | U10.16 69.92,57.59 69.85,57.66 | U10.16 68.22,57.26 67.82,57.66 66.67,57.66 C37.1
  Top 0.61: R14.1 61.85,63.25 62.61,62.48 C35.1
  Top 0.813: C37.1 64.77,56.77 62.87,58.67 62.87,60.45 C35.1
+5VD  (via drill 0.38, 0.43)  (1 unrouted)
  Top 0.254: v97.28,42.09 97.28,42.8
  Top 0.406: J10.2 138.23,98.42 138.48,98.17 138.48,95.33 138.74,95.07 139.45,95.07 139.8,95.43 139.65,95.43 139.6,95.48 | J2.1 | J2.1 84.15,136.17
  Top 0.61: 82.68,128.27 v82.8,128.14 | v62.23,103.38 62.23,106.17 | 62.23,106.17 63.12,107.06 v80.9,107.06 | 62.23,106.17 62.1,106.17 61.34,106.93 56.9,106.93 54.23,104.27 52.96,104.27 v52.83,104.39 | v42.67,107.19 40.77,107.82 | R17.1 106.1,47.73 105.66,47.3 v105.16,47.3 | PS1.23 50.55,95.25 | 49.28,68.07 50.67,67.06 57.02,67.06 R14.2 | 97.28,42.8 97.41,42.8 97.54,42.67 | v97.28,42.09 97.66,30.86 98.93,29.59 101.85,29.59 | v125.5,69.37 125.68,69.37 127.41,67.64 127.43,67.64 128.45,66.62 132.87,66.62 133.07,66.83 | LCD1.1 v103.71,29.62 | v109.68,29.59 110.21,29.59 115.21,24.59 144.09,24.59 145.06,25.55 145.06,30.15 144.93,30.28
  Top 0.813: 50.55,95.25 47.62,95.25 47.37,95 | 97.54,42.67 86.49,42.67 v81.66,47.5 | v63.63,56.01 63.5,56.01 63.25,55.75
  Top 1.016: v82.8,127 v82.8,128.14
  Top 1.27: v82.8,128.14 82.8,128.65 83.91,129.75 D1.A D2.C
  Bottom 0.254: 102.74,43.18 98.42,43.18 v97.28,42.09
  Bottom 0.61: v62.23,103.38 61.98,103.12 61.98,96.14 61.21,95.38 57.78,95.38 | v80.9,107.06 81.03,107.06 82.68,108.71 82.68,126.87 v82.8,127 | v52.83,104.39 45.47,104.27 v42.67,107.19 | v105.16,47.3 105.16,45.59 102.74,43.18 | PS1.22 PS1.23 | JP2.2 120.78,68.68 121.46,69.37 v125.5,69.37 | v103.71,29.62 109.65,29.62 v109.68,29.59
  Bottom 0.813: v81.66,47.5 68.2,47.5 64.9,50.8 64.9,54.74 v63.63,56.01
  Bottom 1.016: v82.8,127 v82.8,128.14
  pour Top (isolate 0.406, rank 3): -4.83,147.32 150.5,147.32 150.24,27.69 -5.08,27.69
+12VA  (via drill 0.3, 0.43, 0.7)
  Top 0.254: U10.26 71.92,50.84 71.5,50.42 | U10.39 80.04,54.26 80.32,53.98 80.64,53.98
  Top 0.305: JP2.5 114.5,62.36 112.8,64.06 111.3,64.06 103.07,55.88 100.13,55.88 98.45,57.61
  Top 0.406: v69.47,50.8 69.72,50.8 70.1,50.42 71.5,50.42 | 82.3,52.07 81.66,51.44 v81.15,51.44 | C18.1 59.18,97.54 v58.55,98.17 | v81.66,53.98 80.64,53.98 | v81.18,61.9 93.24,61.72 97.23,57.61 98.45,57.61 98.5,57.66
  Top 0.61: 82.3,52.07 C39.1 82.42,53.34 81.79,53.98 v81.66,53.98 | C40.1 v69.47,50.8 | C18.1 62.61,97.54 C19.1 65.23,98.3 U6.1 65.46,98.09 65.53,98.17 65.53,95.5 65.79,95.25 69.72,95.25 71.25,93.73 77.72,93.73 81.66,89.79 81.66,78.23 81.15,77.6 v81.15,69.6
  Bottom 0.61: v69.47,50.8 69.47,52.96 69.85,53.34 70.99,53.34 73.15,51.18 80.77,51.18 v81.15,51.44 | v81.15,69.6 81.15,61.77 v81.18,61.9 82.14,60.96 82.17,54.48 v81.66,53.98
+15V
  Top 0.61: R8.1 68.63,98.3 U6.3
  Top 0.813: PS1.14 C20.1 74.55,97.66 C17.1 71.63,97.66 70.99,98.3 R8.1
-12VA  (via drill 0.3, 0.43, 0.64, 0.7)
  Top 0.254: U10.24 69.92,52.89 v70.48,52.32 | U10.34 75.92,50.07 76.33,49.66 v76.71,49.66 | U10.41 81.55,55.26 82.04,55.24 83.19,55.24 v83.57,54.86 | U10.29 73.42,49.54 v73.15,49.15 | U10.48 78.59,58.93 | v81.15,57.02 80.76,56.76 U10.44
  Top 0.305: v71.68,66.44 72.53,66.44 76.07,69.98 78.11,69.98 78.36,70.23 | JP2.6 120.62,62.36 119.58,61.32 114.43,61.32 112.6,63.14 111.23,63.14 107.59,59.51 107.59,57.4 103.53,53.34 98.58,53.34 v98.25,53.62 | v98.3,55.47 98.27,55.47 92.91,60.98 80.21,60.98 v79.88,61.44
  Top 0.61: U9.3 75.26,72.57 75.69,72.14 76.71,72.14 C28.2 76.96,72.26 77.72,71.5 78.99,71.5 | 78.99,71.5 C27.2 | 78.99,71.5 78.99,70.87 v79.88,69.47 | v81.92,50.42 82.8,50.42 83.57,51.18 v83.57,52.83 | 78.59,58.93 79.12,59.46 | 79.12,59.46 v79.76,59.56 | 79.12,59.46 79.35,59.69 C34.1 | v83.57,54.86 C38.1 | v83.31,57.02 v81.15,57.02
  Top 1.016: 78.36,70.23 78.99,70.87
  Bottom 0.254: v70.48,52.32 70.23,52.32 70.48,52.58 | v73.15,49.15 73.15,49.66 72.64,50.16
  Bottom 0.305: v98.25,53.62 98.25,55.42 v98.3,55.47
  Bottom 0.61: v70.48,52.32 72.64,50.16 76.07,50.16 v76.71,49.66 76.71,49.78 76.83,50.04 77.09,50.29 81.41,50.29 v81.92,50.42 | v79.88,69.47 v79.88,61.44 79.88,60.07 v79.76,59.56 79.12,59.46 78.92,59.26 | v81.15,57.02 78.92,59.26 | 78.79,59.13 78.92,59.26 | v83.57,52.83 v83.57,54.86 83.31,55.12 v83.31,57.02
-15V
  Top 0.406: R13.2 69.98,73.15
  Top 0.61: 69.47,73.79 R13.2 70.1,73.28 71.25,74.42 72.9,74.42 | 72.9,74.42 73.66,73.66 U9.2 | PS1.11 77.98,78.61 72.9,74.42
  pour Top (isolate 0.406): 48.9,69.72 48.51,88.27 85.6,88.27 85.6,69.22
A6/20  (via drill 0.38)
  Top 0.406: v104.52,78.36 104.52,78.99 105.92,80.39 105.92,100.33 106.05,100.33 107.44,101.73 107.44,113.92 106.93,114.43 v105.03,114.43 | RT8.2 124.97,27.05 123.83,27.05 122.05,28.83 122.05,69.47 120.27,71.25 114.1,71.27 110.19,67.36 107.85,67.36 104.65,70.48 v104.65,74.8
  Bottom 0.406: v104.52,78.36 104.52,74.93 v104.65,74.8 | M2.20/A6 109.22,129.41 107.57,127.76 106.17,127.76 105.03,126.62 v105.03,114.43
A16  (via drill 0.38, 0.43)
  Top 0.406: v85.98,103.25 81.28,107.95 56.39,107.95 v53.98,105.54 | v43.94,107.44 43.94,107.31 41.4,109.86 33.02,109.86 32.26,109.09 27.69,109.09 25.27,106.68 16.64,106.68 13.46,109.86 13.46,119 12.06,120.4 12.06,121.67 12.57,122.17 13.72,122.17 v14.1,122.56 | v16.51,123.57 17.53,123.57 17.58,123.37 18.06,123.29 R1.1
  Bottom 0.406: v53.98,105.54 45.85,105.54 v43.94,107.44 | v14.1,122.56 15.49,122.56 v16.51,123.57 | v85.98,103.25 92.58,103.25 92.96,102.87 105.54,102.87 106.68,104.01 M2.40
A17  (via drill 0.38)
  Top 0.305: v96.77,104.27 96.52,104.01 96.52,101.73 95,100.2 93.34,100.2 92.58,99.44 92.58,96.01 93.47,95.12 95,95.12 96.14,93.98 96.14,82.8 96.27,82.68
  Top 0.406: 96.27,82.68 103.12,75.82 105.28,75.82 105.66,75.44 105.66,73.66 106.27,73.03 110.85,73.03 111.89,72.01 120.9,72.01 122.81,70.1 122.81,30.48 123.95,29.34 RT7.2
  Bottom 0.305: v96.77,104.27 96.9,104.27 97.03,104.14 99.69,104.14
  Bottom 0.406: M2.41 107.7,106.55 105.28,104.14 99.69,104.14
AGND  (via drill 0.43, 0.6, 0.64 pad 0.43)
  Top 0.254: v79.76,52.58 79.76,53.34 79.34,53.76 U10.38 76.42,53.76 v76.07,54.1 | U10.18 U10.17 | 45.85,114.94 45.09,114.94 44.82,114.67 U4.9 44.82,114.8 44.96,114.94 v44.45,115.44 | U10.17 67.32,56.76 C37.2 | U10.18 67.95,56.26 67.44,56.77 | U10.18 72.01,56.26 v72.26,56.01 72.39,56.13 72.39,56.64 72.28,56.76 U10.17 | C40.2 69.6,49.28 v69.72,49.4
  Top 0.305: C1.2 21.69,124.87 v21.57,124.92 | C15.2 18.41,110.24 v17.91,109.73 18.8,108.84 R6.1 | U1.4 28.32,115.82 28.07,115.82 v28.19,115.57 | U3.8 30.65,121.84 v30.73,121.92 | C16.2 13.56,120.75 v13.08,120.78 | C18.2 61.34,101.09 v60.45,101.98
  Top 0.406: C39.2 v79.76,52.58 | C38.2 85.98,54.36 85.47,53.85 v84.84,53.72 | 69.47,49.28 v69.72,49.4 | v69.34,101.22 71.37,101.22 71.75,101.47 | 45.85,114.94 45.85,114.55 46.35,114.05 C10.2 | U1.6 U1.5 29.91,122.74 v30.73,121.92
  Top 0.61: U9.1 72.16,71.91 71.75,71.5 70.23,71.5 R13.1 v70.1,70.1 | R8.2 69.34,100.84 | C34.2 v83.95,59.69 | C27.1 v79.12,76.45 | C28.1 v76.83,75.06 | C29.1 65.15,70.74 v65.28,70.61 | C30.1 68.2,70.61 v68.96,69.72 | C31.2 v65.41,68.45 | v60.45,101.98 60.45,105.16 59.94,105.66 57.15,105.66 54.74,103.25 v51.94,103.25 | C20.2 77.47,99.69 | JP2.3 115.44,64.92 115.16,65.2 115.16,65.28 114.2,66.24 103.48,66.17 102.46,67.18 95.76,67.18 93.17,69.77 93.17,72.19 v91.36,73.99
  Top 0.813: 74.93,95.5 PS1.16 | C20.2 74.04,100.71 C17.2 71.75,100.71 71.12,100.08 R8.2 | C32.2 v64.14,63.12 | C36.2 64.39,60.71 v64.26,60.58 | C35.2 v59.56,59.18
  Bottom 0.254: v79.76,52.58 80.01,52.7 | v44.45,115.44 44.2,115.95 43.94,115.7
  Bottom 0.305: v21.57,124.92 21.46,126.75 | v17.91,109.73 17.91,109.6 17.78,109.47 | v28.19,115.57 27.81,115.19 | v30.73,121.92 30.35,121.92 30.23,121.79 | v13.08,120.78 13.08,120.65 12.95,120.52 | v60.45,101.98 60.2,101.73
  Bottom 0.406: v69.72,49.4 69.6,49.4 69.47,49.28 | 69.47,102.36 69.49,102.42 69.34,101.47 71.25,101.47 v69.34,101.22
  Bottom 0.61: v83.95,59.69 83.69,59.44 83.57,59.44 | v79.12,76.45 79.12,76.2 78.87,75.95 | v76.83,75.06 76.58,75.06 | v65.28,70.61 65.28,70.48 64.9,70.1 | v68.96,69.72 66.93,69.22 66.8,69.09 | v70.1,70.1 70.1,69.85 69.98,69.72 | v65.41,68.45 64.9,68.2 64.64,67.94 | v51.94,103.25 45.09,103.25 41.27,107.19 39.62,107.19 37.34,109.47 | v91.36,73.99 84.15,73.99 84.05,73.89
  Bottom 0.813: v64.14,63.12 64.14,62.48 | v64.26,60.58 63.88,60.2 | v59.56,59.18 59.56,58.93 59.44,58.8
  other vias: 74.17,56.01 74.17,57.91 76.07,57.91 76.07,56.01 74.17,54.1 72.26,54.1 72.26,57.91
  pour Bottom (isolate 0.508, rank 2): 0.38,-0.38 0.25,16.89 17.91,17.14 17.78,29.72 17.65,60.07 59.94,60.07 59.94,106.17 84.71,106.17 85.09,23.88 137.03,23.88 137.29,-0.76
  pour Top (isolate 0.406): 85.09,108.58 84.84,89.53 49.02,89.66 49.02,108.58
  pour Bottom (isolate 0.381): 7.49,146.81 7.49,128.65 12.57,128.78 12.57,107.31 47.12,106.93 46.99,116.33 37.9,116.36 37.9,147.22
CIPO  (via drill 0.38, 0.43)
  Top 0.254: U10.7 73.92,64.27 74.42,64.77
  Top 0.305: v86.36,109.22 86.23,109.47 86.21,109.47 85.57,110.11 80.52,110.11 | 80.52,110.11 53.34,110.11 53.34,109.86 v53.47,109.86 | 80.52,110.11 v80.52,110.24 | U3.3 37.23,118.35 37.47,118.11 37.47,116.84 41.27,113.03 v41.27,112.65 | v76.91,119.76 75.82,119.76 73.15,122.43 73.15,126.62 IC1.J2.6 63.12,127.13 60.86,124.87 58.34,124.89 57.23,125.96 57.28,127.41 56.19,128.5 56.19,133.53 55.42,134.29 55.42,141.25 54.38,142.29 45.19,142.29 44.42,143.05 44.37,143.05 44.07,143.36 38.41,143.36 J26.6 36.4,141.63 35.41,140.61 35.41,138.1 J3.4
  Top 0.406: 74.42,64.77 74.55,64.77 76.73,66.93 83.84,66.93 v87,70.1 87,108.71 v86.36,109.22 | v90.55,70.1 90.55,68.71 97.03,62.23 LCD1.13
  Bottom 0.305: v80.52,110.24 80.52,116.08 v76.91,119.76 | v53.47,109.86 53.47,108.84 52.32,107.7 46.61,107.7 41.78,112.52 41.4,112.65 v41.27,112.65
  Bottom 0.406: v86.36,109.22 92.08,109.22 M2.12/MISO | v87,70.1 v90.55,70.1 | LCD1.9 100.46,52.07 99.69,52.83 99.69,60.74 LCD1.13
COPI  (via drill 0.38, 0.43)
  Top 0.254: U10.4 75.42,62 75.44,62.1 75.44,62.87 77.39,64.72 | 43.01,113.84 U4.6 43.32,113.94 v42.29,114.05 | 37.97,119.63 36.04,119.63 U3.5 | 37.19,135.51 44.83,135.51 47.24,137.92 51.66,137.92 52.25,138.51 54.28,138.51 54.86,137.92
  Top 0.305: 85.34,113.92 82.42,113.92 79.25,110.74 53.09,110.74 52.7,110.36 v52.58,110.36 | IC1.J1.3 55.5,132.59 55.47,124.08 52.05,120.6 v52.07,117.86 50.55,117.86 v48.9,116.2 | 37.97,119.63 38.86,118.75 38.86,117.47 v42.29,114.05 | IC1.J1.3 53.24,134.75 | IC1.J1.3 53.9,134.75 54.86,135.71 54.86,137.92 | 37.19,135.51 35.48,135.51 J3.3 33.71,136.85 32.87,137.69 32.87,140.36 J26.4
  Top 0.406: 77.39,64.72 86.16,64.72 89.53,68.07 | 89.53,68.07 v89.53,113.92 85.34,113.92 | LCD1.12 97.92,59.69 89.53,68.07
  Bottom 0.305: v52.58,110.36 52.58,110.49 51.94,111.12 51.94,117.73 v52.07,117.86 | v42.29,114.05 45.34,114.05 47.37,116.2 v48.9,116.2
  Bottom 0.406: v89.53,113.92 94.23,113.92 M2.11/MOSI | LCD1.6 102.49,45.47 104.14,47.12 104.14,56.99 LCD1.12
DAC0_OUT
  Top 0.305: R1.2 20.04,125.3 16.64,128.4 16.64,132.72 J4.P$1
DAC_REF
  Top 0.254: U10.12 70.3,60.26 70.23,60.33
  Top 0.813: C36.1 69.85,60.71 70.23,60.33
DDS  (via drill 0.43)
  Top 0.254: U4.10 45.32,112.38 44.58,111.63 39.5,111.63 38.99,112.14 39.39,112.14 C13.-
  Top 0.305: 38.99,112.14 38.23,112.14 37.34,111.25 v24.77,111.25 | v17.91,111.25 17.4,111.25 16.38,110.24 OUT.1
  Bottom 0.305: v24.77,111.25 v17.91,111.25
DDS_OUT
  Top 0.305: R5.2 16.18,120.73 C16.1 16.2,122.22 14.86,123.57 13.46,123.57 12.45,124.59 12.45,127.89 13.08,128.52 14.61,128.52 15.11,129.16 15.11,131.44 J4.P$2
DGND  (via drill 0.43, 0.64)
  Top 0.254: U10.2 76.42,61.18 76.71,61.47 77.85,61.47 arc-90 v77.98,61.34 78.23,61.34 79.12,62.1 C33.2 79.5,62.92 | U4.4 43.82,117.23 43.69,117.09 42.93,117.09 42.29,117.73 42.29,118.82 41.71,119.46 41.66,119.51 v40.79,119.51 | 93.47,144.65 94.36,144.65 94.49,144.78 | v43.41,140.13 43.41,139.85 43.28,139.72
  Top 0.305: C11.2 33.4,113.41 33.66,113.67 | U3.7 37.67,120.95 38.86,119.76 39.5,119.76 C4.2 39.75,119.51 | U3.1 v36.4,116.25 36.45,115.95 | U5.15 114.79,115.55 v113.79,115.57 | C25.2 33.17,76.35 v32.64,76.33 32.64,78.11 33.14,78.6 U7.19 | U7.23 v35.7,81.52 v35.69,81.53 | U7.5 33.78,87 v33.4,87.63 | C41.1 74.04,132.59 IC1.J2.4 | J11.1 66.52,140.66 v66.57,140.61 | X1.2 36.45,124.03 37.44,123.04 37.97,123.04 38,123.01 39.27,123.01 v39.93,122.35
  Top 0.406: 80.77,136.65 80.95,136.7 J2.5 | U5.5 U5.4 114.83,122.7 v114.94,122.68 | 93.47,144.65 92.96,145.16 91.31,145.16 v89.28,143.13 | U2.2 v122.68,95.63 | U8.2 v122.3,91.95 121.35,91 U8.1 | U11.1 48.62,120.86 v48.64,119.63
  Top 0.61: v70.99,62.48 69.85,63.63 69.85,64.52 69.72,64.52 69.34,64.9 64.26,64.9 v63.88,64.52 | C7.2 39.75,118.36 v39.75,118.24 39.62,118.49 C4.2 | 39.75,119.51 v40.79,119.51 | 79.5,62.92 86.84,62.92 v86.92,62.89 | JP1.1 143.76,11.94 JP1.2 144.02,14.48 JP1.3 143.76,17.27 143.51,17.53 143.76,17.53 JP1.4 | C14.2 78.99,128.27 v78.87,128.14 | C12.2 78.74,130.3 v78.61,130.18 | 33.66,113.67 v34.04,113.92 | C8.1 33.66,116.46 v33.53,116.59
  Top 1.016: 80.9,132.33 80.77,132.33 80.39,132.33 79.63,131.57 79.63,130.43 C12.2
  Top 1.27: 80.77,132.33 v80.77,132.72 v80.77,133.99 80.77,136.65
  Bottom 0.254: 40.64,121.61 40.59,121.56 | 40.51,140.18 43.36,140.18 v43.41,140.13
  Bottom 0.305: v40.79,119.51 40.79,120.19 40.77,120.27 | v113.79,115.57 113.79,115.06 | 95.63,138.3 92.84,138.3 92.58,138.56 92.58,140.21 93.09,140.72 93.34,140.72 93.6,140.97 93.6,140.84 96.39,140.84 96.52,140.72 | v32.64,76.33 33.15,76.2 | v35.69,81.53 35.56,81.53 35.43,81.41 | v33.4,87.63 33.15,87.5 33.02,87.38 | v66.57,140.61 66.57,140.06 66.32,139.8 | v39.93,122.35 39.73,122 39.52,122
  Bottom 0.406: 81.28,132.72 81.15,132.59 80.52,132.59 | 113.03,122.68 v114.94,122.68 113.41,122.58 113.03,122.56 111.89,123.7 111.89,125.98 | 111.76,133.99 110.36,133.35 | v89.28,143.13 89.03,142.88 | 34.42,113.92 34.67,113.92 36.32,115.57 36.32,116.17 v36.4,116.25 37.13,116.25 38.99,118.11 39.75,118.11 v39.75,118.24 39.75,118.49 | v122.68,95.63 122.56,95.25 | v122.3,91.95 122.3,91.82 | v48.64,119.63 47.62,119.48 47.32,119.18
  Bottom 0.61: v77.98,61.34 76.2,61.34 75.06,62.48 v70.99,62.48 | v86.92,62.89 87.15,62.97 | v113.79,115.57 113.28,115.95 113.28,118.62 113.79,119.25 113.79,121.69 113.41,122.58 | JP1.4 144.02,28.13 J24.4 | v63.88,64.52 62.23,64.52 61.72,65.02 57.4,69.47 56.01,70.87 | v78.87,128.14 78.87,128.02 78.61,127.76 | v78.61,130.18 78.36,130.18 78.11,129.92 | 33.02,113.67 33.27,113.92 v34.04,113.92 34.42,113.92 | 33.4,116.59 v33.53,116.59 33.86,116.25 v36.4,116.25 | J3.1 29.06,137.44 30.45,138.84 J26.1 J26.3 J26.5 39.17,138.84 | 39.17,138.84 J26.7 | 39.17,138.84 40.51,140.18
  Bottom 0.813: P1.5 10.59,108.76 8.64,106.81
  Bottom 1.27: v80.77,133.99 80.77,133.86 80.64,134.11 80.26,133.86 v80.77,132.72
  pour Bottom (isolate 0.508, rank 2): -2.79,148.97 73.41,148.34 76.58,148.46 114.05,148.21 114.05,107.57 131.44,107.7 131.44,104.52 148.97,104.52 148.72,89.03 148.46,-1.91 140.34,-1.91 140.08,24.89 86.23,25.02 86.11,107.44 58.55,107.44 58.8,61.47 16.13,61.47 16.64,19.56 -1.52,19.43
EA
  Top 0.406: J38.2 27.41,9.12 J33.2 | J43.1 12.19,11.81 13.84,13.46 13.84,16.26 14.22,16.64 17.14,16.64 18.8,18.29 | 18.8,18.29 RP1.1 | J28.P$2 26.16,14.35 24.51,16 21.08,16 18.8,18.29
  Bottom 0.406: J33.2 27.43,9.27 28.83,10.67 28.83,11.56 J28.P$2
EA1
  Top 0.406: J39.2 53.7,9.12 J34.2 | J29.P$2 52.45,14.35 51.18,15.62 48.26,15.62 RP5.1 41.53,18.03 40.13,16.64 40.13,13.59 38.99,12.45 38.36,11.81 J44.1
  Bottom 0.406: J34.2 53.72,9.4 54.86,10.54 54.86,11.81 J29.P$2
EA2
  Top 0.406: J40.2 79.99,9.12 J35.2 | J30.P$2 78.74,14.73 77.72,14.73 77.09,15.37 73.66,15.37 RP9.1 69.6,16.89 67.18,16.89 66.42,15.75 66.42,13.59 64.77,11.94 J42.1
  Bottom 0.406: J30.P$2 78.87,14.22 80.26,12.83 80.26,9.4 J35.2
EA3
  Top 0.406: J41.2 106.28,9.12 J36.2 | J31.P$2 105.03,14.48 103.76,15.75 99.19,15.75 RP6.1 95.12,18.16 92.84,15.75 92.84,13.59 92.2,12.95 91.69,12.95 90.81,12.06 90.18,12.06 J45.1
  Bottom 0.406: J36.2 106.3,9.4 107.44,10.54 107.44,11.81 J31.P$2
EA4
  Top 0.406: J37.2 132.57,9.25 J32.2 | J27.P$2 131.32,13.97 130.3,12.95 126.36,12.95 122.94,16.38 122.94,17.27 | 122.94,17.27 122.94,18.41 RP3.1 | J46.1 116.97,11.81 119,13.59 119,15.75 119.63,16.38 122.05,16.38 122.94,17.27
  Bottom 0.406: J32.2 132.59,9.4 133.1,9.78 133.1,12.32 J27.P$2
EA5
  Top 0.406: RT3.1 127.51,74.68 J14.P$2 133.99,81.15 135.38,81.15 136.4,80.14 J15.2 142.75,80.14 J16.2 144.02,78.59 144.02,68.33 142.88,67.18 137.67,67.18 136.78,66.29 136.27,65.66 134.75,64.14 J17.1
EA6
  Top 0.406: J23.2 142.73,34.42 J24.2 | J21.1 135.26,44.2 136.4,45.21 141.48,45.21 143.13,43.69 143.13,39.37 144.15,38.23 144.15,35.54 J24.2 | RT8.1 137.03,27.3 138.43,25.91 142.49,25.91 144.15,27.81 144.15,33 J24.2
  Bottom 0.406: J23.2 132.72,34.42 J22.P$2
EA7
  Top 0.406: J12.2 5.46,89.53 6.22,88.77 8.13,88.77 | 8.13,88.77 12.57,88.77 J13.P$2 | RT1.1 13.59,75.44 12.06,73.91 J9.1 11.68,74.04 10.16,74.04 9.53,74.68 9.53,87.25 9.4,87.38 9.4,87.5 8.13,88.77
EA9
  Top 0.406: J18.2 10.41,22.23 10.92,21.72 12.7,21.72 J19.P$2 16.89,25.91 16.89,52.45 18.92,54.48 RT6.1
EA10
  Top 0.406: J18.3 10.67,24.77 J19.P$1 11.94,28.7 16,32.77 16,52.83 RT5.1
EB
  Top 0.406: RP2.1 21.21,18.16 21.97,17.4 25.15,17.4 27.56,14.99 27.56,13.08 J28.P$1 24.89,10.41 | 24.89,10.41 J33.3 24.91,9.12 J38.3 | J43.4 17.91,14.35 18.41,14.35 20.95,14.35 24.89,10.41
EB1
  Top 0.406: J29.P$1 53.72,12.95 53.72,15.37 52.45,16.64 49.66,16.64 RP8.1 | J34.3 51.18,9.65 | 51.18,9.65 51.18,10.41 J29.P$1 | J39.3 51.2,9.63 51.18,9.65 | J44.4 46.1,14.35 48.64,11.81 52.32,11.81 J29.P$1
EB2
  Top 0.406: RP10.1 73.28,18.16 74.55,16.89 77.09,16.89 77.98,16 79.25,16 79.88,15.37 79.88,12.83 J30.P$1 | J30.P$1 78.74,10.41 J35.3 77.47,3.45 J40.3 | J42.4 70.74,14.48 73.28,11.94 78.49,11.94 J30.P$1
EB3
  Top 0.406: J31.P$1 105.03,10.41 J36.3 103.78,9.12 J41.3 | RP7.1 100.2,16.76 105.03,16.76 106.3,15.49 106.3,12.95 J31.P$1 | J45.4 97.28,14.35 99.95,11.68 J31.P$1
EB4
  Top 0.406: RP4.1 126.11,18.54 127.76,16.89 130.56,16.89 132.59,14.86 132.59,13.08 J27.P$1 | J27.P$1 131.32,10.54 J32.3 130.07,9.25 J37.3 | J46.4 120.14,14.35 122.81,11.68 J27.P$1
EB5
  Top 0.406: RT4.1 131.44,72.39 131.7,72.64 | 131.7,72.64 134.37,75.31 134.37,78.74 | 134.37,78.74 J14.P$1 | 134.37,78.74 136.27,78.74 J15.3 142.73,77.6 J16.3 | J17.4 131.7,72.64
EB6
  Top 0.406: J22.P$1 135.38,31.75 136.91,31.75 J23.3 137.05,31.9 J24.3 | RT7.1 127.25,29.34 129.79,31.88 132.72,31.88 J22.P$1 | J21.4 131.83,48 J21.4 131.44,47.88 132.84,46.74 132.84,44.58 131.57,43.56 131.57,38.23 134.11,35.69 134.11,33.27 J22.P$1
EB8  (via drill 0.6)
  Top 0.305: 4.45,72.59 4.27,72.59 2.97,73.66 3,76.78 4.55,78.33 4.47,82.93 v4.42,82.98
  Top 0.406: J12.3 5.08,92.08 6.99,89.92 11.3,89.92 J13.P$1 | J9.4 16.64,70.11 18.41,71.88 RT2.1 17.4,73.15 16.38,74.17 13.97,74.17 12.32,72.52 4.45,72.59
  Bottom 0.406: J12.3 1.52,90.3 1.52,85.9 v4.42,82.98
EN_A
  Top 0.406: U2.1 120.97,94.74 130.56,94.74 J20.P$2 131.7,95.76 133.4,94.06 134.8,94.06 136.14,95.43 136.4,95.68 J10.3
EN_B  (via drill 0.43)
  Top 0.406: J10.1 135.89,101.09 | 135.89,101.09 131.44,101.09 127,96.65 120.98,96.65 U2.3 | 135.89,101.09 v134.24,99.44 J20.P$1
ENCA3V3  (via drill 0.38, 0.43)
  Top 0.406: v101.35,93.09 100.71,93.73 100.71,94.74 98.3,97.16 98.3,126.49 99.31,127.51 99.24,127.58 99.24,128.96 98.75,129.44 96.55,129.44 95.3,130.68 93.88,130.68 93.19,131.37 93.19,135.74 M2.2 | U2.6 118.42,94.49 114.05,94.49 v112.9,93.34
  Bottom 0.406: v101.35,93.09 108.2,93.09 108.71,92.58 112.14,92.58 v112.9,93.34
ENCB3V3  (via drill 0.38, 0.43)
  Top 0.305: M2.5 94.61,129.41 97.66,126.24 97.66,101.73 95.76,99.95 95.76,98.04 v99.69,94.11 | U2.4 118.55,96.65 114.43,96.65 113.16,95.38 v112.78,95.38
  Bottom 0.305: v99.69,94.11 108.08,94.11 109.09,95.12 112.52,95.12 v112.78,95.38
ERST  (via drill 0.43)
  Top 0.305: IC1.J2.5 73.66,129.79 | U11.2 51.02,122.5 v53.92,125.4
  Top 0.406: v58.7,126.06 60.55,126.09 62.71,128.4 72.39,128.4 IC1.J2.5
  Bottom 0.406: v53.92,125.4 58.09,125.4 v58.7,126.06
ETH_CS/SDA2  (via drill 0.43)